# Altium PCB clock_led.PcbDoc (part 3 of 3)
Units mm, origin at the board's own origin, x right, y up, seen from the top; angles counter-clockwise.
Board outline 60 x 80 mm, 4 copper layers (TL, L2, L3, BL), stack 1.564 mm thick; 321 components, 72 nets, 902 pads, 698 vias.
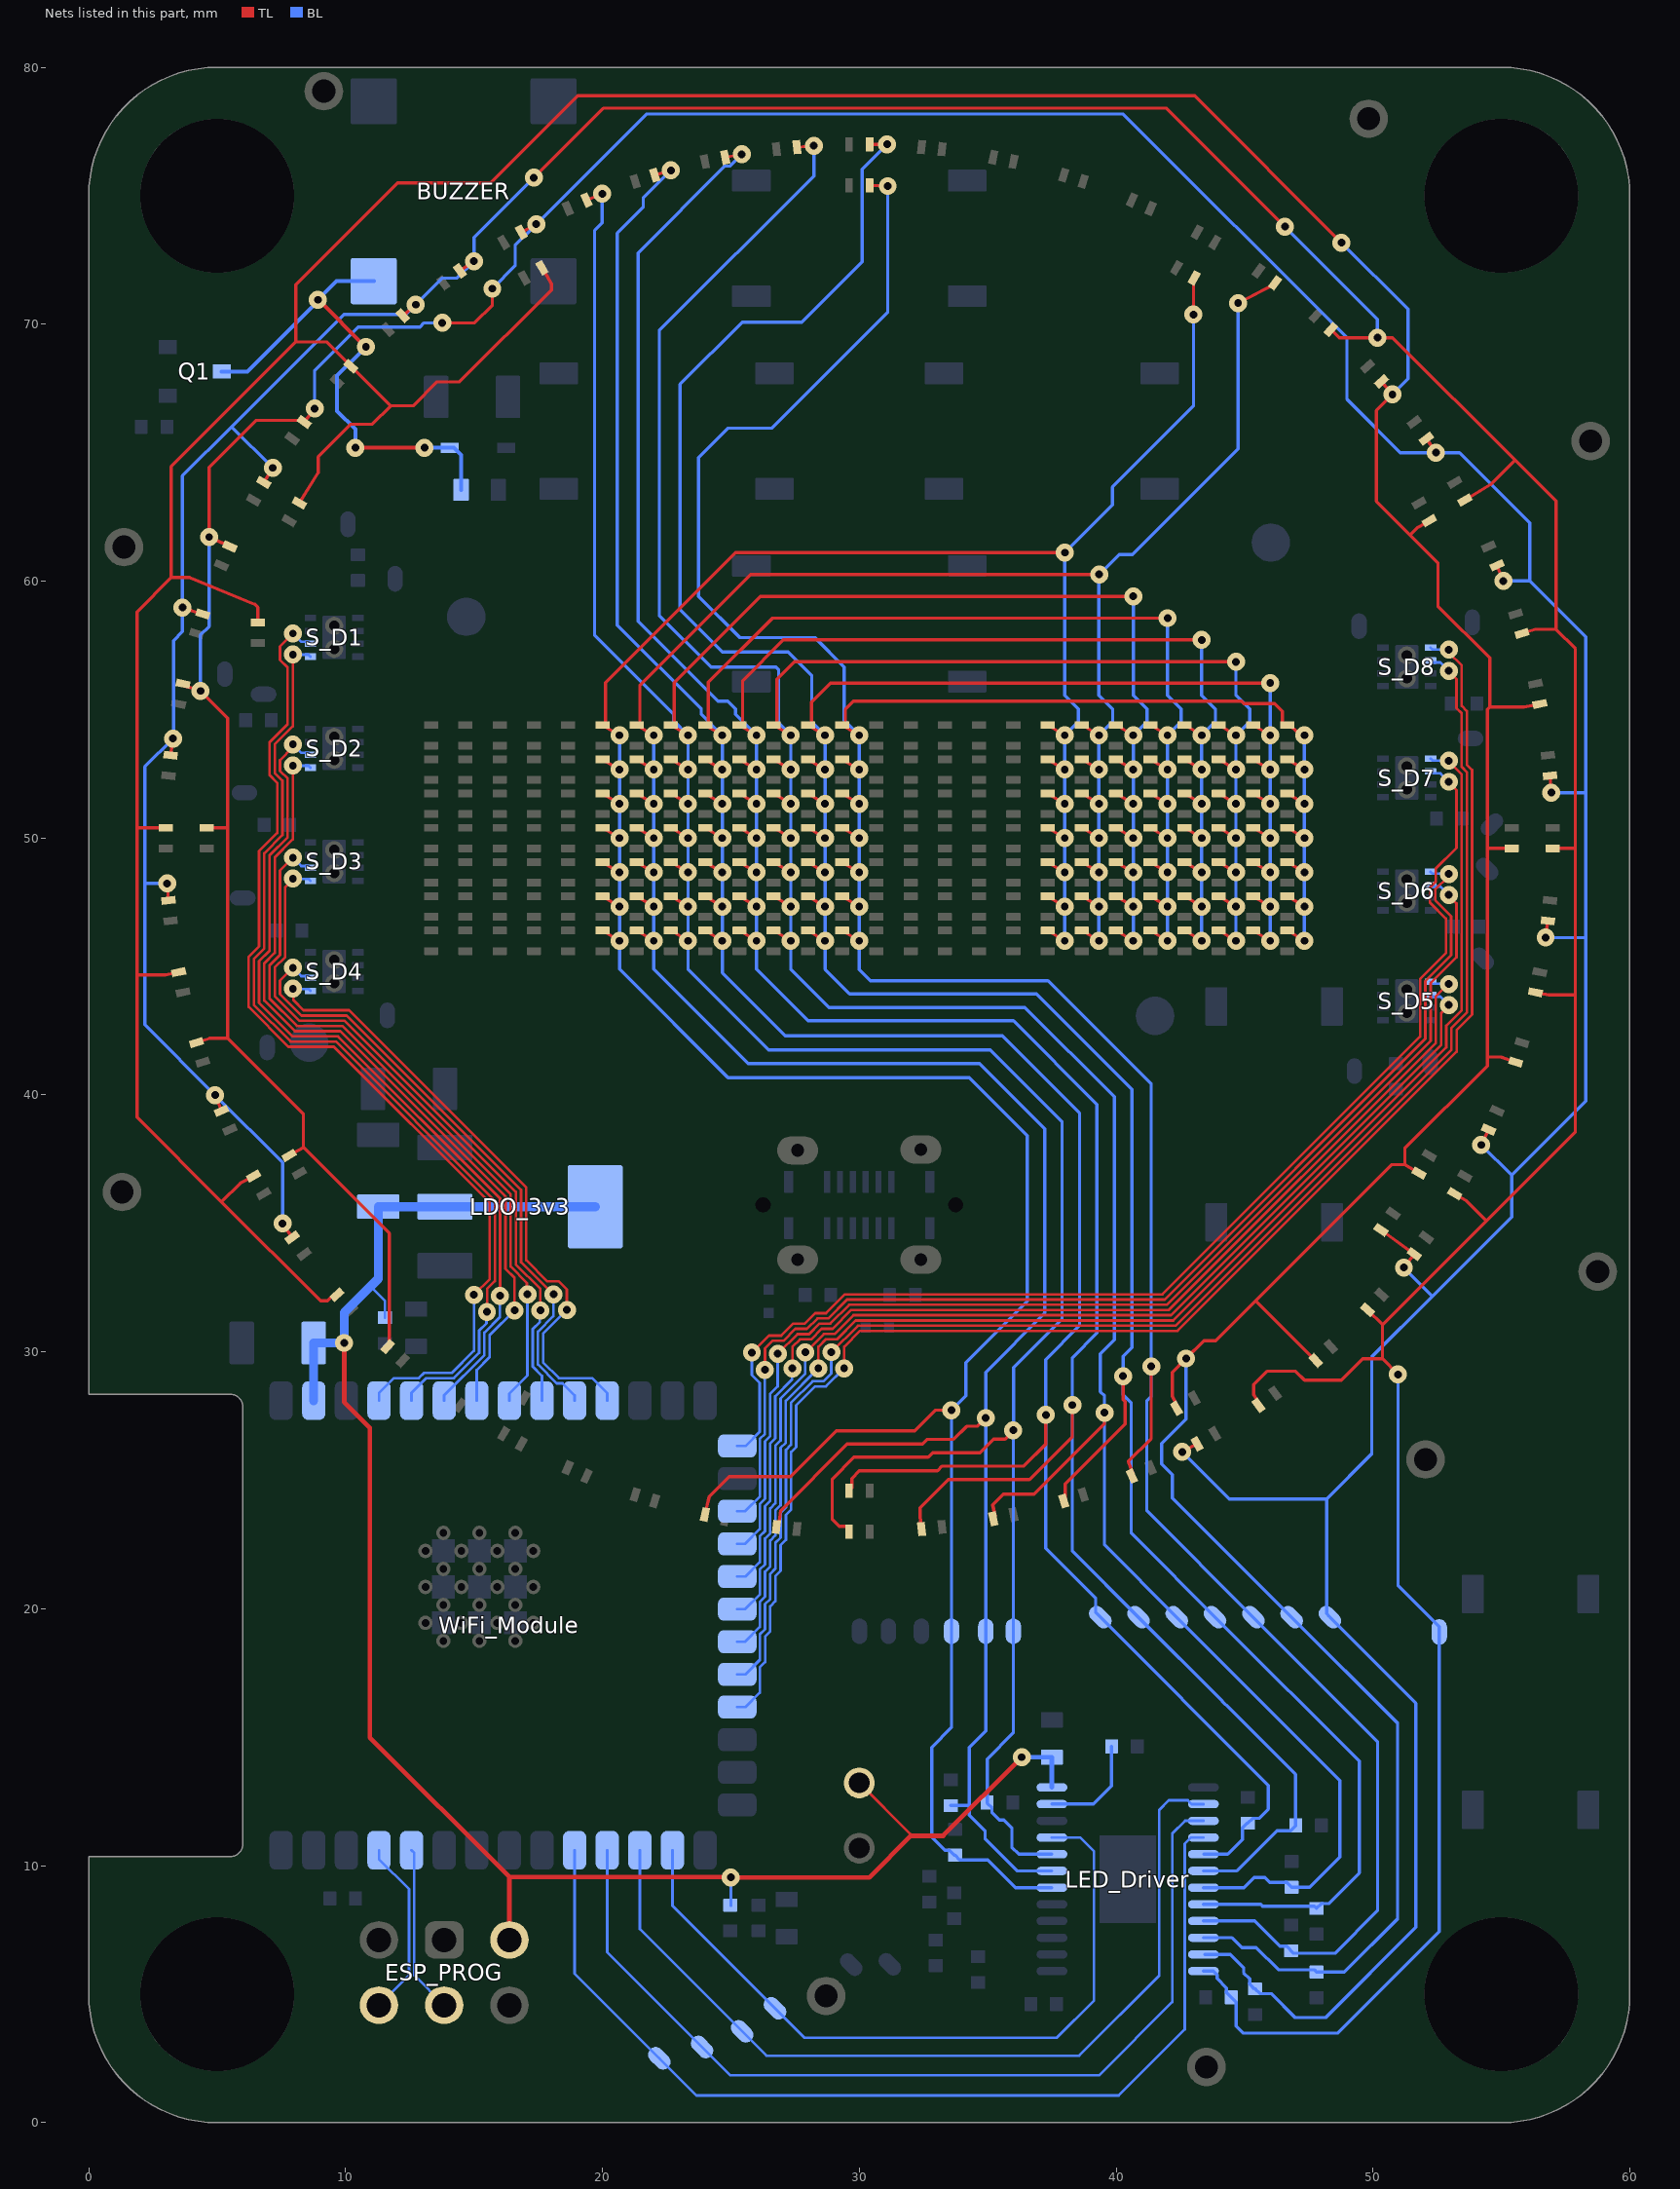
[diagram p5: the nets of this part, all layers, seen from the top]

## Via types
v1: diameter 0.7, hole 0.3, TL to BL, tented both sides, 689 vias
v2: diameter 0.7, hole 0.3, TL to BL, tented top, 6 vias
v3: diameter 1.5, hole 0.9, TL to BL, 3 vias

## Nets (pads, with @x,y where several pads share a name; then routed paths per layer and width w, separated by ;. In a path a pad name is that pad's centre, name@x,y a point inside that pad or via, vN(x,y) a via of type N, cw(c..) or ccw(c..) an arc to the next point about the centre after c; other vN are vias at no path point) (continued)
K5: C10.2 D6.1 D22.1 D38.1 D54.1 D70.1 D86.1 D102.1 D118.1 D134.1 D150.1 D166.1 D182.1 D198.1 D214.1 D230.1 D246.1 LED_Driver.18 pad.2@33.59,19.13 | length 134.4
  TL w0.127: D198.1@20,46.4 v1(20.667,46) ; D166.1@20,47.733 v1(20.667,47.333) ; D134.1@20,49.067 v1(20.667,48.667) ; D102.1@20,50.4 v1(20.667,50) ; D70.1@20,51.733 v1(20.667,51.333) ; D38.1@20,53.067 v1(20.667,52.667) ; D6.1@20,54.4 20.04,54.4 20.126,54.486 20.126,56.049 25.187,61.11 v1@38.013,61.11 ; D6.1@20.074,54.356 v1(20.667,54) ; D230.1@23.995,23.673 24.041,23.867 24.16,24.369 24.941,25.15 27.327,25.15 29.109,26.932 32.16,26.932 32.961,27.733 v1(33.59,27.733) ; D214.1@37.333,46.4 v1(38,46) ; D182.1@37.333,47.733 v1(38,47.333) ; D150.1@37.333,49.067 v1(38,48.667) ; D118.1@37.333,50.4 v1(38,50) ; D86.1@37.333,51.733 v1(38,51.333) ; D54.1@37.333,53.067 v1(38,52.667) ; D22.1@37.333,54.4 v1(38,54) v1@38.003,54.003 ; v1(43.013,70.375) 43.013,71.764 D246.1@43.046,71.797
  BL w0.127: v1(20.667,54) v1(20.667,52.667) v1(20.667,51.333) v1(20.667,50) v1(20.667,48.667) v1(20.667,47.333) v1(20.667,46) 20.667,44.899 24.89,40.676 34.291,40.676 36.543,38.424 36.543,31.971 34.157,29.586 34.157,28.3 v1(33.59,27.733) pad.2@33.59,19.13 33.59,15.38 32.824,14.613 32.824,11.109 33.328,10.604 33.514,10.604 C10.2@33.713,10.405 ; C10.2@33.725,10.417 33.912,10.231 35.008,10.231 36.088,9.15 LED_Driver.18@37.5,9.15 ; v1(38,46) v1(38,54) 38.532,54.532 38.532,55.029 38.006,55.555 v1(38.006,61.108) 39.86,62.963 39.86,63.661 43.013,66.814 v1(43.013,70.375)
K6: C11.2 D7.1 D23.1 D39.1 D55.1 D71.1 D87.1 D103.1 D119.1 D135.1 D151.1 D167.1 D183.1 D199.1 D215.1 D231.1 D247.1 LED_Driver.19 pad.2@34.923,19.13 | length 131.6
  TL w0.127: D199.1@21.334,46.4 v1(22,46) ; D167.1@21.334,47.733 v1(22,47.333) ; D135.1@21.334,49.067 v1(22,48.667) ; D103.1@21.334,50.4 v1(22,50) ; D71.1@21.334,51.733 v1(22,51.333) ; D39.1@21.334,53.067 v1(22,52.667) ; D7.1@21.334,54.4 21.374,54.4 21.46,54.486 21.46,55.95 25.77,60.26 v1(39.339,60.26) ; D7.1@21.407,54.356 v1(22,54) ; D231.1@26.78,23.19 26.871,23.261 26.94,23.824 29.532,26.417 32.466,26.417 32.648,26.598 33.67,26.598 34.18,27.108 34.587,27.108 34.91,27.431 v1(34.923,27.431) ; D215.1@38.666,46.4 v1(39.333,46) ; D183.1@38.666,47.733 v1(39.333,47.333) ; D151.1@38.666,49.067 v1(39.333,48.667) ; D119.1@38.666,50.4 v1(39.333,50) ; D87.1@38.666,51.733 v1(39.333,51.333) ; D55.1@38.666,53.067 v1(39.333,52.667) ; D23.1@38.666,54.4 v1(39.333,54) v1@39.336,54.003 ; v1(44.75,70.825) 44.767,70.825 46.178,71.557 D247.1@46.194,71.608
  BL w0.127: v1(22,54) v1(22,52.667) v1(22,51.333) v1(22,50) v1(22,48.667) v1(22,47.333) v1(22,46) 22,44.899 25.679,41.22 34.682,41.22 37.221,38.682 37.221,31.508 34.923,29.211 v1(34.923,27.431) pad.2@34.923,19.13 34.923,15.249 34.285,14.611 34.285,11.968 34.903,11.35 34.903,11.042 36.145,9.8 LED_Driver.19@37.5,9.8 ; C11.2@33.563,12.345 34.285,12.345 ; v1(39.333,46) v1(39.333,54) 39.865,54.532 39.865,55.029 39.333,55.561 v1@39.333,60.254 ; v1(39.339,60.26) 40.115,61.036 40.632,61.036 44.75,65.154 v1(44.75,70.825)
K7: C12.2 D8.1 D24.1 D40.1 D56.1 D72.1 D88.1 D104.1 D120.1 D136.1 D152.1 D168.1 D184.1 D200.1 D216.1 D232.1 D248.1 LED_Driver.20 pad.2@35.998,19.13 | length 137.1
  TL w0.127: D248.1@19.384,74.828 v1(19.995,75.078) ; D200.1@22.667,46.4 v1(23.334,46) ; D168.1@22.667,47.733 v1(23.334,47.333) ; D136.1@22.667,49.067 v1(23.334,48.667) ; D104.1@22.667,50.4 v1(23.334,50) ; D72.1@22.667,51.733 v1(23.334,51.333) ; D40.1@22.667,53.067 v1(23.334,52.667) ; D8.1@22.667,54.4 D8.1@22.707,54.4 ; D8.1@22.74,54.356 v1(23.334,54) ; D8.1@22.767,54.4 D8.1@22.707,54.4 ; D232.1@29.6,23 29.6,23.099 29.489,23.211 29.22,23.211 28.95,23.481 28.95,25.054 29.796,25.9 32.685,25.9 32.861,26.076 34.705,26.076 35.238,26.609 35.68,26.609 35.998,26.927 v1(35.998,26.95) ; D216.1@40,46.4 v1(40.666,46) ; D184.1@40,47.733 v1(40.666,47.333) ; D152.1@40,49.067 v1(40.666,48.667) ; D120.1@40,50.4 v1(40.666,50) ; D88.1@40,51.733 v1(40.666,51.333) ; D56.1@40,53.067 v1(40.666,52.667) ; D24.1@40,54.4 v1(40.666,54) v1@40.669,54.002 ; v1(40.671,59.41) 26.146,59.41 22.793,56.057 22.793,54.486 D8.1@22.707,54.4
  BL w0.127: v1(19.995,75.078) 19.995,73.95 19.698,73.653 19.698,57.887 22.773,54.811 22.773,54.56 v1(23.334,54) v1(23.334,52.667) v1(23.334,51.333) v1(23.334,50) v1(23.334,48.667) v1(23.334,47.333) v1(23.334,46) 23.334,44.899 26.479,41.753 35.094,41.753 37.898,38.949 37.898,31.282 36.013,29.396 36.013,26.964 v1(35.998,26.95) pad.2@35.998,19.13 35.998,15.176 34.981,14.159 C12.2@34.981,12.459 ; C12.2@34.981,12.434 35.168,12.247 35.168,12.059 35.451,11.776 35.639,11.776 35.941,11.474 35.941,10.722 36.213,10.45 LED_Driver.20@37.5,10.45 ; v1(40.666,46) v1(40.666,54) 41.199,54.532 41.199,55.029 40.666,55.561 40.666,59.405 v1(40.671,59.41)
K8: C13.2 D9.1 D25.1 D41.1 D57.1 D73.1 D89.1 D105.1 D121.1 D137.1 D153.1 D169.1 D185.1 D201.1 D217.1 D233.1 D249.1 LED_Driver.5 pad.2@39.382,19.674 | length 139.6
  TL w0.127: D249.1@22.038,75.802 v1(22.671,75.986) ; D201.1@24,46.4 v1(24.667,46) ; D169.1@24,47.733 v1(24.667,47.333) ; D137.1@24,49.067 v1(24.667,48.667) ; D105.1@24,50.4 v1(24.667,50) ; D73.1@24,51.733 v1(24.667,51.333) ; D41.1@24,53.067 v1(24.667,52.667) ; D9.1@24,54.4 D9.1@24.04,54.4 ; D9.1@24.074,54.356 v1(24.667,54) ; D9.1@24.1,54.4 D9.1@24.04,54.4 ; D233.1@29.6,24.6 29.709,24.709 29.709,25.075 30.003,25.369 33.045,25.369 33.23,25.554 36.411,25.554 37.264,26.407 v1(37.264,27.549) ; D217.1@41.333,46.4 v1(42,46) ; D185.1@41.333,47.733 v1(42,47.333) ; D153.1@41.333,49.067 v1(42,48.667) ; D121.1@41.333,50.4 v1(42,50) ; D89.1@41.333,51.733 v1(42,51.333) ; D57.1@41.333,53.067 v1(42,52.667) ; D25.1@41.333,54.4 v1(42,54) v1@42.001,54.001 ; v1(42.003,58.56) 26.617,58.56 24.126,56.069 24.126,54.486 D9.1@24.04,54.4
  BL w0.127: v1(22.671,75.986) 21.59,74.905 21.59,74.551 20.579,73.54 20.579,58.29 23.849,55.02 23.849,54.81 v1@24.658,54 ; v1(24.667,54) v1(24.667,52.667) v1(24.667,51.333) v1(24.667,50) v1(24.667,48.667) v1(24.667,47.333) v1(24.667,46) 24.667,44.758 27.122,42.303 35.573,42.303 38.576,39.3 38.576,31.014 37.264,29.702 v1(37.264,27.549) 37.264,22.356 39.204,20.416 39.204,19.852 45.929,13.128 45.929,12.206 45.569,11.846 45.315,11.846 C13.2@45.129,11.66 45.104,11.66 44.917,11.473 44.917,11.025 44.342,10.449 LED_Driver.5@43.422,10.449 ; v1(42,46) v1(42,54) 42.532,54.532 42.532,55.029 42,55.561 42,58.557 v1(42.003,58.56)
K9: C14.2 D10.1 D26.1 D42.1 D58.1 D74.1 D90.1 D106.1 D122.1 D138.1 D154.1 D170.1 D186.1 D202.1 D218.1 D234.1 D250.1 LED_Driver.6 pad.2@40.872,19.674 | length 140.6
  TL w0.127: D250.1@24.778,76.493 v1(25.428,76.61) ; D202.1@25.333,46.4 v1(26,46) ; D170.1@25.333,47.733 v1(26,47.333) ; D138.1@25.333,49.067 v1(26,48.667) ; D106.1@25.333,50.4 v1(26,50) ; D74.1@25.333,51.733 v1(26,51.333) ; D42.1@25.333,53.067 v1(26,52.667) ; D10.1@25.333,54.4 D10.1@25.374,54.4 ; D10.1@25.407,54.356 v1(26,54) ; D10.1@25.433,54.4 D10.1@25.374,54.4 ; D234.1@32.424,23.106 32.401,23.316 32.372,23.575 32.372,23.931 33.474,25.032 36.628,25.032 38.296,26.701 v1(38.296,27.932) ; D218.1@42.666,46.4 v1(43.333,46) ; D186.1@42.666,47.733 v1(43.333,47.333) ; D154.1@42.666,49.067 v1(43.333,48.667) ; D122.1@42.666,50.4 v1(43.333,50) ; D90.1@42.666,51.733 v1(43.333,51.333) ; D58.1@42.666,53.067 v1(43.333,52.667) ; D26.1@42.666,54.4 v1(43.333,54) ; v1(43.335,57.71) 27.039,57.71 25.46,56.13 25.46,54.486 D10.1@25.374,54.4
  BL w0.127: v1(25.428,76.61) 24.972,76.155 24.767,76.155 21.39,72.778 21.39,58.437 24.505,55.322 24.88,55.322 25.182,55.02 25.182,54.818 v1(26,54) v1(26,52.667) v1(26,51.333) v1(26,50) v1(26,48.667) v1(26,47.333) v1(26,46) 26,44.899 28.013,42.886 36.002,42.886 39.254,39.633 39.254,30.738 38.296,29.78 v1(38.296,27.932) 38.296,22.251 pad.2@40.872,19.674 44.124,16.423 44.124,16.415 44.425,16.113 44.433,16.113 46.991,13.556 46.991,11.548 46.804,11.361 46.266,11.361 44.704,9.8 LED_Driver.6@43.4,9.8 ; v1(43.333,46) v1(43.333,54) 43.865,54.532 43.865,55.029 43.333,55.561 43.333,57.708 v1(43.335,57.71)
K10: C15.2 D11.1 D27.1 D43.1 D59.1 D75.1 D91.1 D107.1 D123.1 D139.1 D155.1 D171.1 D187.1 D203.1 D219.1 D235.1 D251.1 LED_Driver.7 pad.2@42.363,19.674 | length 142
  TL w0.127: D203.1@26.667,46.4 v1(27.333,46) ; D171.1@26.667,47.733 v1(27.333,47.333) ; D139.1@26.667,49.067 v1(27.333,48.667) ; D107.1@26.667,50.4 v1(27.333,50) ; D75.1@26.667,51.733 v1(27.333,51.333) ; D43.1@26.667,53.067 v1(27.333,52.667) ; D11.1@26.667,54.4 26.707,54.4 26.793,54.486 26.793,56.18 27.473,56.86 v1(44.666,56.86) ; D11.1@26.74,54.356 v1(27.333,54) ; D251.1@27.576,76.894 v1@28.234,76.943 ; D235.1@35.222,23.507 35.288,23.609 35.194,24.045 35.614,24.466 36.799,24.466 39.546,27.213 v1(39.546,27.637) ; D219.1@44,46.4 v1(44.666,46) ; D187.1@44,47.733 v1(44.666,47.333) ; D155.1@44,49.067 v1(44.666,48.667) ; D123.1@44,50.4 v1(44.666,50) ; D91.1@44,51.733 v1(44.666,51.333) ; D59.1@44,53.067 v1(44.666,52.667) ; D27.1@44,54.4 v1(44.666,54)
  BL w0.127: v1(28.234,76.942) 28.234,75.766 22.217,69.748 22.217,58.667 24.229,56.654 26.758,56.654 26.865,56.548 26.865,54.469 v1(27.333,54) v1(27.333,52.667) v1(27.333,51.333) v1(27.333,50) v1(27.333,48.667) v1(27.333,47.333) v1(27.333,46) 27.333,44.899 28.825,43.408 36.453,43.408 39.932,39.928 39.932,30.466 39.39,29.924 39.39,28.453 39.546,28.297 v1(39.546,27.637) 39.546,22.49 pad.2@42.363,19.674 48.713,13.324 48.713,10.338 47.542,9.167 C15.2@46.831,9.167 46.644,9.354 45.982,9.354 45.797,9.539 45.37,9.539 44.981,9.15 LED_Driver.7@43.4,9.15 ; v1(44.666,46) v1(44.666,54) 45.198,54.532 45.198,55.029 44.666,55.561 v1(44.666,56.86)
K11: C16.2 D12.1 D28.1 D44.1 D60.1 D76.1 D92.1 D108.1 D124.1 D140.1 D156.1 D172.1 D188.1 D204.1 D220.1 D236.1 D252.1 LED_Driver.8 pad.2@43.853,19.674 | length 142.2
  TL w0.127: D204.1@28,46.4 v1(28.667,46) ; D172.1@28,47.733 v1(28.667,47.333) ; D140.1@28,49.067 v1(28.667,48.667) ; D108.1@28,50.4 v1(28.667,50) ; D76.1@28,51.733 v1(28.667,51.333) ; D44.1@28,53.067 v1(28.667,52.667) ; D12.1@28,54.4 D12.1@28.074,54.4 ; D12.1@28.074,54.356 v1(28.667,54) ; D12.1@28.1,54.4 D12.1@28.074,54.4 ; D252.1@30.4,77 v1(31.083,77) ; D236.1@37.963,24.198 38.014,24.248 38.014,24.859 40.355,27.2 40.355,28.063 40.27,28.148 v1(40.27,29.058) ; D220.1@45.333,46.4 v1(46,46) ; D188.1@45.333,47.733 v1(46,47.333) ; D156.1@45.333,49.067 v1(46,48.667) ; D124.1@45.333,50.4 v1(46,50) ; D92.1@45.333,51.733 v1(46,51.333) ; D60.1@45.333,53.067 v1(46,52.667) ; D28.1@45.333,54.4 v1(46,54) ; v1(46,56.035) 28.878,56.035 28.139,55.296 28.139,54.465 D12.1@28.074,54.4
  BL w0.127: v1(31.083,77) 30.114,76.031 30.114,72.43 27.762,70.079 25.447,70.079 23.028,67.66 23.028,58.889 24.675,57.243 27.227,57.243 28.152,56.318 28.152,54.515 v1(28.667,54) v1(28.667,52.667) v1(28.667,51.333) v1(28.667,50) v1(28.667,48.667) v1(28.667,47.333) v1(28.667,46) 28.667,44.891 29.628,43.93 36.895,43.93 40.61,40.214 40.61,30.166 40.27,29.826 v1(40.27,29.058) 40.27,28.322 40.588,28.004 40.588,22.939 pad.2@44.025,19.502 ; LED_Driver.8@43.4,8.5 45.633,8.5 45.702,8.431 47.717,8.431 C16.2@47.806,8.342 47.992,8.528 48.269,8.528 49.463,9.722 49.463,14.074 pad.2@44.035,19.502 ; v1(46,46) v1(46,54) v1(46,56.035)
K12: C17.2 D13.1 D29.1 D45.1 D61.1 D77.1 D93.1 D109.1 D125.1 D141.1 D157.1 D173.1 D189.1 D205.1 D221.1 D237.1 D253.1 LED_Driver.9 pad.2@45.343,19.674 | length 138.9
  TL w0.127: D205.1@29.333,46.4 v1(30,46) ; D173.1@29.333,47.733 v1(30,47.333) ; D141.1@29.333,49.067 v1(30,48.667) ; D109.1@29.333,50.4 v1(30,50) ; D77.1@29.333,51.733 v1(30,51.333) ; D45.1@29.333,53.067 v1(30,52.667) ; D13.1@29.333,54.4 29.407,54.4 29.46,54.453 29.46,55.018 29.767,55.325 44.884,55.325 44.98,55.229 46.178,55.229 46.48,54.927 46.48,54.486 46.566,54.4 46.766,54.4 47.057,54.11 47.223,54.11 v1(47.333,54) ; D13.1@29.407,54.356 v1(30,54) ; D253.1@30.4,75.4 v1(31.108,75.376) ; D237.1@40.616,25.172 40.656,25.259 40.472,25.737 41.367,26.632 v1(41.367,29.437) ; D221.1@46.666,46.4 v1(47.333,46) ; D189.1@46.666,47.733 v1(47.333,47.333) ; D157.1@46.666,49.067 v1(47.333,48.667) ; D125.1@46.666,50.4 v1(47.333,50) ; D93.1@46.666,51.733 v1(47.333,51.333) ; D61.1@46.666,53.067 v1(47.333,52.667)
  BL w0.127: v1(31.108,75.376) 31.108,70.458 26.604,65.954 24.894,65.954 23.746,64.807 23.746,59.402 25.346,57.802 28.269,57.802 29.41,56.66 29.41,54.59 v1(30,54) v1(30,52.667) v1(30,51.333) v1(30,50) v1(30,48.667) v1(30,47.333) v1(30,46) 30,44.882 30.431,44.452 37.348,44.452 41.367,40.433 v1(41.367,29.437) 41.367,28.27 41.197,28.099 41.197,23.821 pad.2@45.343,19.674 50.18,14.838 50.18,8.257 48.516,6.593 46.914,6.593 46.639,6.868 46.383,6.868 45.401,7.85 LED_Driver.9@43.4,7.85 ; v1(47.333,46) v1(47.333,47.333) v1(47.333,48.667) v1(47.333,50) v1(47.333,51.333) v1(47.333,52.667) v1(47.333,54)
K13: C18.2 D14.1 D30.1 D46.1 D62.1 D78.1 D94.1 D110.1 D126.1 D142.1 D158.1 D174.1 D190.1 D206.1 D222.1 D238.1 D254.1 LED_Driver.11 pad.2@48.323,19.674 | length 201.2
  TL w0.127: D78.1@3.673,56.005 3.726,55.914 4.337,55.752 v1(4.353,55.726) 5.416,54.662 5.416,50.4 ; D142.1@4.198,42.037 4.399,42.104 4.7,42.204 5.416,42.204 ; D110.1@4.6,50.4 5.416,50.4 ; D46.1@5.493,61.358 v1(4.691,61.715) 4.691,64.428 6.522,66.259 8.327,66.259 D14.1@8.392,66.194 ; D174.1@7.803,37.646 7.987,37.75 8.36,37.961 ; D14.1@8.392,66.194 v1(8.796,66.716) ; D206.1@11.636,30.203 11.703,30.27 11.703,34.618 8.36,37.961 ; v1(13.764,70.05) 15.031,70.05 15.715,70.734 v1(15.715,71.385) ; D254.1@16.847,73.582 v1(17.428,73.895) ; v1(42.572,26.105) D238.1@43.154,26.417 ; D222.1@50.314,34.747 50.485,34.622 51.437,33.931 D190.1@51.608,33.806 ; v1(51.204,33.284) D190.1@51.608,33.806 ; D30.1@52.079,65.547 v1(52.45,65) ; v1(54.216,38.058) D158.1@54.502,38.652 ; D62.1@54.828,60.616 v1(55.078,60.005) ; v1(56.721,46.126) D126.1@56.809,46.779 ; D94.1@56.893,52.424 v1(56.942,51.766) ; 5.416,42.204 8.36,39.26 8.36,37.961 ; 5.416,42.204 5.416,50.4
  BL w0.127: v1(4.353,55.726) 4.353,57.899 4.691,58.237 v1(4.691,61.715) ; v1(8.796,66.716) 8.796,68.202 10.485,69.89 12.899,69.89 13.059,70.05 v1(13.764,70.05) ; v1(15.715,71.385) 16.603,72.273 16.603,73.069 v1(17.428,73.895) 21.713,78.179 40.273,78.179 48.988,69.464 48.988,67.072 51.06,65 v1(52.45,65) 53.368,65 56.107,62.261 56.107,60.005 ; v1(42.572,26.105) 44.402,24.275 48.196,24.275 ; LED_Driver.11@43.463,6.554 43.468,6.55 44.455,6.55 44.964,6.04 44.964,5.837 45.198,5.604 45.198,5.396 45.384,5.209 C18.2@45.407,5.209 ; C18.2@45.432,5.209 C18.2@45.407,5.209 ; pad.2@48.303,19.704 48.196,19.81 48.196,24.275 ; pad.2@48.323,19.674 51.675,16.323 51.675,7.603 48.165,4.093 46.961,4.093 46.032,5.023 45.594,5.023 C18.2@45.407,5.209 ; v1(51.204,33.284) 52.319,32.169 ; v1(54.216,38.058) 55.4,36.874 ; v1(55.078,60.005) 56.107,60.005 ; v1(56.721,46.126) 58.285,46.126 ; v1(56.942,51.766) 58.285,51.766 ; 48.196,24.275 49.953,26.032 49.953,29.803 52.319,32.169 ; 52.319,32.169 55.4,35.25 55.4,36.874 ; 55.4,36.874 58.285,39.758 58.285,46.126 ; 56.107,60.005 58.285,57.828 58.285,51.766 ; 58.285,46.126 58.285,51.766
K14: C19.2 D15.1 D31.1 D47.1 D63.1 D79.1 D95.1 D111.1 D127.1 D143.1 D159.1 D175.1 D191.1 D207.1 D223.1 D239.1 D255.1 LED_Driver.10 pad.2@46.833,19.674 | length 219.1
  TL w0.127: D111.1@3,50.4 1.878,50.4 ; D143.1@3.507,44.778 3.3,44.736 2.987,44.672 1.878,44.672 ; D175.1@6.417,36.846 6.231,36.746 5.895,36.564 5.172,35.842 ; D79.1@6.589,58.39 6.589,58.977 6.469,59.097 3.94,60.138 3.217,60.138 ; D47.1@8.203,63.046 8.938,64.225 8.938,64.838 10.207,66.107 11.037,66.107 11.754,66.823 ; D207.1@9.667,32.231 9.568,32.236 9.291,31.988 9.026,31.988 5.172,35.842 ; D15.1@10.203,68.364 9.255,69.311 8.071,69.311 ; D15.1@10.213,68.364 11.754,66.823 ; D255.1@17.646,72.197 17.754,72.015 18.013,71.576 18.013,71.325 14.443,67.755 13.564,67.755 12.632,66.823 11.754,66.823 ; D239.1@42.354,27.803 42.385,27.898 42.187,28.287 42.187,29.208 v1(42.723,29.743) 43.419,30.439 43.878,30.439 45.438,31.999 ; D223.1@47.769,29.667 45.438,31.999 ; v1(48.773,73.175) 43.057,78.891 19.041,78.891 15.651,75.501 12.033,75.501 8.071,71.54 8.071,69.311 ; D31.1@50.333,67.769 v1(50.759,67.265) 50.131,66.637 50.131,63.108 51.446,61.793 ; D191.1@51.797,36.954 51.616,37.063 51.241,37.288 ; D63.1@52.197,62.354 52.015,62.246 51.732,62.078 51.446,61.793 ; D127.1@55.4,49.6 54.453,49.6 ; D159.1@55.555,41.276 55.009,41.469 54.966,41.476 54.453,41.476 ; D95.1@56.493,55.222 56.286,55.181 55.881,55.1 54.544,55.1 ; 1.878,44.672 1.878,50.4 ; 1.878,44.672 1.878,39.135 5.172,35.842 ; 1.878,50.4 1.878,58.8 3.217,60.138 ; 3.217,60.138 3.217,64.457 8.071,69.311 ; 45.438,31.999 50.726,37.288 51.241,37.288 ; 51.241,37.288 51.241,37.921 54.453,41.133 54.453,41.476 ; 51.446,61.793 52.53,60.709 52.53,59.027 54.544,57.013 54.544,55.1 ; 54.453,41.476 54.453,49.6 ; 54.453,49.6 54.453,55.009 54.544,55.1
  BL w0.127: v1(42.723,29.743) 42.723,27.382 41.77,26.43 41.77,25.641 42.189,25.222 42.189,24.318 pad.2@46.833,19.674 50.958,15.55 50.958,7.934 48.886,5.863 C19.2@47.806,5.863 47.716,5.952 46.317,5.952 45.455,6.814 44.899,6.814 44.514,7.2 LED_Driver.10@43.4,7.2 ; v1(48.773,73.175) 51.366,70.582 51.366,67.872 v1(50.759,67.265)
K15: C20.2 D16.1 D32.1 D48.1 D64.1 D80.1 D96.1 D112.1 D128.1 D144.1 D160.1 D176.1 D192.1 D208.1 D224.1 D240.1 D256.1 LED_Driver.12 pad.2@52.583,19.098 | length 197
  TL w0.127: v1(3.058,48.234) D144.1@3.106,47.576 ; D112.1@3.19,53.22 v1(3.279,53.874) ; v1(3.651,58.969) 4.43,58.716 D80.1@4.445,58.724 ; v1(4.922,39.995) D176.1@5.172,39.384 ; D48.1@6.817,63.846 v1(7.165,64.408) ; v1(7.55,35) D208.1@7.922,34.455 ; D16.1@12.231,70.333 v1(12.735,70.759) ; D256.1@14.455,72.078 v1(15,72.45) ; v1(17.329,75.701) 20.036,78.408 41.967,78.408 v1(46.575,73.8) ; D240.1@45.547,27.921 45.567,28.023 45.362,28.329 45.362,28.738 45.874,29.25 46.984,29.25 47.337,28.898 48.773,28.898 49.604,29.729 50.371,29.729 ; D32.1@48.364,69.796 48.685,69.475 v1(50.175,69.475) 50.767,69.475 55.528,64.714 ; D224.1@49.797,31.636 50.371,31.062 ; v1(50.975,29.125) 50.371,29.729 ; D192.1@53.183,36.154 53.365,36.046 53.64,35.885 54.417,35.108 ; D64.1@53.583,63.154 54.585,63.763 55.523,64.701 ; 55.532,64.71 57.125,63.117 57.125,58.122 ; D96.1@55.802,57.963 56.004,58.026 56.31,58.122 57.125,58.122 ; D160.1@56.327,43.995 56.534,43.953 56.836,43.891 57.879,43.891 ; D128.1@57,49.6 57.879,49.6 ; 50.371,29.729 50.371,31.062 ; 50.371,31.062 54.417,35.108 ; 54.417,35.108 57.879,38.57 57.879,43.891 ; 57.125,58.122 57.879,57.368 57.879,49.6 ; 57.879,43.891 57.879,49.6
  BL w0.127: v1(3.058,48.234) 2.185,48.234 ; v1(7.165,64.408) 5.563,66.01 ; v1(7.55,35) 7.55,37.367 v1(4.922,39.995) 2.185,42.733 2.185,48.234 ; v1(17.329,75.701) 15,73.371 v1(15,72.45) 14.343,71.793 13.77,71.793 12.359,70.382 9.935,70.382 5.563,66.01 ; LED_Driver.12@43.4,5.9 43.784,5.9 43.934,5.75 43.934,5.613 44.301,5.247 44.301,5.064 C20.2@44.487,4.877 44.674,4.691 44.674,3.76 44.948,3.485 48.626,3.485 52.583,7.443 52.583,19.302 50.975,20.91 v1(50.975,29.125) ; v1(46.575,73.8) 50.175,70.2 v1(50.175,69.475) ; 2.185,48.234 2.185,52.779 v1(3.279,53.874) 3.302,53.897 3.302,57.687 3.651,58.036 v1(3.651,58.969) 3.651,64.098 5.563,66.01
LEDCLK: LED_Driver.3 pad.2@23.879,2.946 WiFi_Module.30 | length 37.1
  BL w0.102: WiFi_Module.30@20.191,10.605 20.191,6.634 24.984,1.841 39.336,1.841 42.187,4.692 42.187,11.249 42.687,11.75 LED_Driver.3@43.4,11.75
LEDIREF: LED_Driver.23 R38.1 | length 4.2
  BL w0.127: LED_Driver.23@37.5,12.4 39.125,12.4 39.825,13.1 R38.1@39.825,14.65
LEDLATCH: LED_Driver.4 pad.2@22.217,2.507 WiFi_Module.31 | length 39.6
  BL w0.102: WiFi_Module.31@18.921,10.605 18.921,5.804 pad.2@22.217,2.507 23.664,1.061 40.1,1.061 42.673,3.634 42.673,10.861 42.912,11.1 LED_Driver.4@43.4,11.1
LEDMOSI: LED_Driver.2 pad.2@25.443,3.557 WiFi_Module.29 | length 35
  BL w0.102: WiFi_Module.29@21.461,10.605 21.461,7.539 26.391,2.609 38.559,2.609 41.677,5.727 41.677,12.175 42.049,12.546 42.791,12.546 42.938,12.4 LED_Driver.2@43.4,12.4
LEDPWM: LED_Driver.21 pad.2@26.718,4.457 WiFi_Module.28 | length 29
  BL w0.102: WiFi_Module.28@22.731,10.605 22.731,8.444 27.868,3.307 37.682,3.307 39.14,4.765 39.14,10.559 38.598,11.1 LED_Driver.21@37.5,11.1
NetBUZZER_2: BUZZER.2 C23.2 D257.A Q1.D | length 20.3
  TL w0.152: v1(8.925,70.95) 8.945,70.95 10.775,69.12 v1(10.796,69.12) ; v1(10.381,65.188) v1(13.075,65.188)
  BL w0.152: Q1.D@5.175,68.161 6.187,68.161 8.925,70.899 v1(8.925,70.95) 9.65,71.675 BUZZER.2@11.1,71.675 ; v1(10.381,65.188) 10.381,65.914 9.675,66.62 9.675,67.999 v1(10.796,69.12) ; v1(13.075,65.188) 14.226,65.188 14.5,64.914 C23.2@14.5,63.55
RX: ESP_PROG.6 WiFi_Module.37 | length 7
  BL w0.102: ESP_PROG.6@11.301,4.575 12.47,5.745 12.47,9.093 11.301,10.262 WiFi_Module.37@11.301,10.605
SW0: S_D7.6 WiFi_Module.15 | length 47.4
  TL w0.102: v1(25.82,29.973) 26.484,30.638 26.962,30.638 27.425,31.101 27.878,31.101 28.286,31.509 28.71,31.509 29.441,32.241 41.805,32.241 51.838,42.274 51.838,44.52 52.843,45.525 52.843,46.869 52.219,47.493 52.219,48.078 52.446,48.304 52.446,48.811 53.249,49.614 53.249,51.863 52.95,52.162 v1(52.95,52.19)
  BL w0.102: WiFi_Module.15@25.251,26.34 25.571,26.34 26.122,26.89 26.122,28.799 25.82,29.101 v1(25.82,29.973) ; S_D7.6@52.243,52.591 52.317,52.517 52.623,52.517 v1(52.95,52.19)
SW1: S_D6.5 WiFi_Module.17 | length 45.7
  TL w0.102: v1@26.329,29.31 26.329,30.14 26.623,30.434 27.047,30.434 27.51,30.897 27.962,30.897 28.371,31.306 28.794,31.306 29.526,32.038 41.889,32.038 52.041,42.19 52.041,44.436 53.046,45.441 53.046,46.953 52.422,47.577 52.422,47.993 52.925,48.496 v1@52.925,48.604
  BL w0.102: WiFi_Module.17@25.251,23.8 25.56,23.8 26.128,24.368 26.128,26.609 26.325,26.806 v1(26.325,29.306) ; S_D6.5@52.243,48.686 52.317,48.612 52.942,48.612 v1(52.95,48.604)
SW2: S_D6.6 WiFi_Module.18 | length 45.8
  TL w0.102: v1(26.831,29.932) 27.594,30.694 28.046,30.694 28.455,31.103 28.878,31.103 29.61,31.834 41.973,31.834 52.244,42.106 52.244,44.352 53.249,45.357 53.249,47.458 52.95,47.757 v1(52.95,47.785)
  BL w0.102: WiFi_Module.18@25.251,22.53 25.55,22.53 26.128,23.108 26.128,24.081 26.331,24.284 26.331,26.521 26.528,26.718 26.528,28.357 26.827,28.656 v1@26.827,29.928 ; S_D6.6@52.243,48.186 52.317,48.112 52.623,48.112 v1(52.95,47.785)
SW3: S_D5.5 WiFi_Module.19 | length 43.2
  TL w0.102: v1(27.398,29.362) 27.398,30.196 ; 27.399,30.197 27.693,30.491 28.13,30.491 28.539,30.899 28.962,30.899 29.694,31.631 42.057,31.631 52.448,42.022 52.448,43.845 v1@52.925,44.322
  BL w0.102: WiFi_Module.19@25.251,21.26 25.573,21.26 26.128,21.815 26.128,22.82 26.331,23.023 26.331,23.996 26.534,24.2 26.534,26.437 26.731,26.634 26.731,28.272 27.378,28.919 27.378,29.342 v1(27.398,29.362) ; S_D5.5@52.243,44.403 52.317,44.329 52.942,44.329 v1(52.95,44.322)
SW4: S_D5.6 WiFi_Module.20 | length 43.5
  TL w0.102: v1(27.901,29.989) 27.915,29.989 28.623,30.696 29.046,30.696 29.778,31.428 42.141,31.428 52.651,41.937 52.651,43.175 52.95,43.475 v1(52.95,43.503)
  BL w0.102: WiFi_Module.20@25.251,19.99 25.562,19.99 26.128,20.555 26.128,21.528 26.331,21.731 26.331,22.736 26.534,22.939 26.534,23.912 26.737,24.115 26.737,26.353 26.934,26.55 26.934,28.188 27.9,29.154 v1(27.901,29.989) ; S_D5.6@52.243,43.903 52.317,43.829 52.623,43.829 v1(52.95,43.503)
SW5: S_D7.5 WiFi_Module.21 | length 54.6
  TL w0.102: v1(28.407,29.363) 28.413,29.37 28.413,30.199 28.707,30.493 29.13,30.493 29.862,31.225 42.226,31.225 52.854,41.853 52.854,42.696 53.452,43.294 53.452,52.481 v1@52.925,53.009
  BL w0.102: WiFi_Module.21@25.251,18.72 25.557,18.72 26.128,19.29 26.128,20.268 26.331,20.471 26.331,21.444 26.534,21.647 26.534,22.652 26.737,22.855 26.737,23.828 26.941,24.031 26.941,26.269 27.138,26.466 27.138,28.094 v1(28.407,29.363) ; S_D7.5@52.243,53.091 52.317,53.017 52.942,53.017 v1(52.95,53.009)
SW6: S_D8.6 WiFi_Module.22 | length 59.7
  TL w0.102: v1(28.915,29.991) 29.946,31.022 42.31,31.022 53.057,41.769 53.057,42.612 53.656,43.21 53.656,52.565 53.452,52.769 53.452,54.854 53.249,55.057 53.249,56.183 52.95,56.482 v1(52.95,56.51)
  BL w0.102: WiFi_Module.22@25.251,17.45 25.564,17.45 26.132,18.018 26.132,19.005 26.331,19.204 26.331,20.182 26.534,20.385 26.534,21.359 26.737,21.563 26.737,22.568 26.941,22.771 26.941,23.744 27.144,23.947 27.144,26.185 27.341,26.382 27.341,28.01 28.192,28.861 28.615,28.861 28.909,29.155 v1@28.909,29.984 ; S_D8.6@52.243,56.911 52.317,56.837 52.623,56.837 v1(52.95,56.51)
SW7: S_D8.5 WiFi_Module.23 | length 61.8
  TL w0.102: v1(29.411,29.361) 29.418,29.367 29.418,30.206 30.03,30.818 42.394,30.818 53.26,41.685 53.26,42.528 53.859,43.126 53.859,52.65 53.656,52.853 53.656,54.938 53.452,55.141 53.452,56.719 52.95,57.221 v1(52.95,57.329)
  BL w0.102: WiFi_Module.23@25.251,16.18 25.574,16.18 26.128,16.733 26.128,17.726 26.335,17.933 26.335,18.921 26.534,19.12 26.534,20.098 26.737,20.301 26.737,21.275 26.941,21.478 26.941,22.484 27.144,22.687 27.144,23.66 27.347,23.863 27.347,26.101 27.544,26.298 27.544,27.926 28.276,28.658 28.708,28.658 v1(29.411,29.361) ; S_D8.5@52.243,57.411 52.317,57.337 52.942,57.337 v1(52.95,57.329)
SW8: S_D1.6 WiFi_Module.4 | length 39.8
  TL w0.102: v1(7.95,57.963) 7.448,57.46 7.448,56.936 7.747,56.636 7.747,54.437 7.041,53.731 7.041,52.447 7.341,52.148 7.341,50.201 6.635,49.495 6.635,45.787 6.229,45.381 6.229,43.423 7.778,41.874 9.544,41.874 15.614,35.804 15.614,32.839 v1(15.001,32.226)
  BL w0.102: v1(7.95,57.963) 8.277,57.636 8.558,57.636 S_D1.6@8.632,57.562 ; WiFi_Module.4@11.301,28.105 11.301,28.404 11.879,28.982 12.859,28.982 13.062,29.185 14.139,29.185 15.001,30.048 v1@15.001,32.15
SW9: S_D1.5 WiFi_Module.5 | length 37.5
  TL w0.102: v1(7.95,57.144) 7.95,54.353 7.245,53.647 7.245,52.531 7.544,52.232 7.544,50.117 6.838,49.411 6.838,45.703 6.432,45.296 6.432,43.507 7.862,42.077 9.628,42.077 15.817,35.888 15.817,32.754 15.511,32.448 15.511,31.563 v1(15.507,31.559)
  BL w0.102: v1(7.95,57.144) 7.958,57.136 8.558,57.136 S_D1.5@8.632,57.062 ; WiFi_Module.5@12.571,28.105 12.571,28.406 13.146,28.982 14.223,28.982 15.205,29.964 15.205,30.834 15.487,31.116 15.487,31.539 v1(15.507,31.559)
SW10: S_D2.6 WiFi_Module.6 | length 33
  TL w0.102: v1(7.95,53.642) 7.95,53.534 7.448,53.031 7.448,52.615 7.747,52.316 7.747,50.032 7.041,49.327 7.041,45.619 6.635,45.212 6.635,43.591 7.946,42.28 9.712,42.28 16.02,35.972 v1@16.02,32.192
  BL w0.102: v1(7.95,53.642) 8.277,53.316 8.558,53.316 S_D2.6@8.632,53.242 ; WiFi_Module.6@13.841,28.105 13.841,28.312 15.408,29.879 15.408,30.75 16.009,31.351 v1@16.009,32.181
  other v1: 16.013,32.185
SW11: S_D2.5 WiFi_Module.7 | length 31.6
  TL w0.102: v1(7.95,52.823) 7.95,49.948 7.245,49.243 7.245,45.535 6.838,45.128 6.838,43.675 8.03,42.483 9.796,42.483 16.223,36.056 16.223,33.237 16.58,32.88 v1(16.58,31.615)
  BL w0.102: v1(7.95,52.823) 7.958,52.816 8.558,52.816 S_D2.5@8.632,52.742 ; WiFi_Module.7@15.111,28.105 15.111,29.295 15.611,29.795 15.611,30.646 v1(16.58,31.615)
SW12: S_D3.6 WiFi_Module.8 | length 27.8
  TL w0.102: v1(7.95,49.238) 7.448,48.735 7.448,45.45 7.041,45.044 7.041,43.759 8.115,42.686 9.88,42.686 16.427,36.14 16.427,33.321 17.063,32.685 17.063,32.261 v1(17.083,32.242)
  BL w0.102: v1(7.95,49.238) 8.277,48.911 8.558,48.911 S_D3.6@8.632,48.837 ; WiFi_Module.8@16.381,28.105 16.381,28.381 17.083,29.083 v1@17.083,32.165
SW13: S_D3.5 WiFi_Module.9 | length 26.9
  TL w0.102: v1(7.95,48.419) 7.95,48.391 7.651,48.092 7.651,45.366 7.245,44.96 7.245,43.844 8.199,42.89 9.965,42.89 16.63,36.224 16.63,33.405 17.585,32.45 17.585,31.619 v1(17.588,31.616)
  BL w0.102: v1(7.95,48.419) 7.958,48.411 8.558,48.411 S_D3.5@8.632,48.337 ; v1(17.588,31.616) 17.569,31.596 17.569,31.173 17.286,30.891 17.286,29.43 17.651,29.065 WiFi_Module.9@17.651,28.105
SW14: S_D4.6 WiFi_Module.10 | length 24.3
  TL w0.102: v1(7.95,44.955) 7.448,44.452 7.448,43.928 8.283,43.093 10.049,43.093 16.833,36.309 16.833,33.489 18.079,32.244 v1(18.097,32.244)
  BL w0.102: v1(7.95,44.955) 8.277,44.628 8.558,44.628 S_D4.6@8.632,44.554 ; v1@18.091,32.237 18.091,31.393 17.489,30.792 17.489,29.514 18.225,28.779 18.453,28.779 18.921,28.311 WiFi_Module.10@18.921,28.105
SW15: S_D4.5 WiFi_Module.11 | length 24.6
  TL w0.102: v1(7.95,44.136) 7.97,44.116 7.97,43.693 8.367,43.296 10.133,43.296 17.036,36.393 17.036,33.573 17.864,32.746 18.305,32.746 18.616,32.435 v1(18.616,31.632)
  BL w0.102: v1(7.95,44.136) 7.958,44.128 8.558,44.128 S_D4.5@8.632,44.054 ; v1(18.616,31.632) 17.692,30.708 17.692,29.598 18.309,28.982 19.602,28.982 20.191,28.393 WiFi_Module.11@20.191,28.105
TX: ESP_PROG.5 WiFi_Module.36 | length 6.6
  BL w0.102: WiFi_Module.36@12.571,10.605 12.674,10.502 12.674,5.742 ESP_PROG.5@13.841,4.575
VCC: C1.2 C3.1 C25.1 ESP_PROG.3 LDO_3v3.2 LED_Driver.24 R1.1 R2.1 U1.C WiFi_Module.2 | length 73.3
  TL w0.102: U1.C@30,13.228 31.999,11.229 31.999,11.18 32.012,11.167
  TL w0.178: v1(9.949,30.35) 9.949,28.051 10.95,27.05 10.95,14.991 16.381,9.56 ; ESP_PROG.3@16.381,7.115 16.381,9.56 ; v1@24.989,9.56 16.381,9.56 ; v1(25.001,9.548) 30.393,9.548 32.012,11.167 33.267,11.167 v1(36.325,14.225)
  BL w0.102: 10.972,32.554 10.974,32.553 11.532,31.994 R1.1@11.532,31.331 ; R2.1@25.001,8.444 v1(25.001,9.548)
  BL w0.178: v1(36.325,14.225) C1.2@37.5,14.225 LED_Driver.24@37.5,13.05
  BL w0.35: WiFi_Module.2@8.761,28.105 C3.1@8.761,30.35 v1(9.949,30.35) 9.949,31.531 10.972,32.554 ; 10.974,32.553 11.276,32.855 C25.1@11.276,35.651 LDO_3v3.2@13.871,35.651 LDO_3v3.2@19.721,35.651
pads on no net: BUZZER.3 BUZZER.4 LED_Driver.22 USB.A8 USB.B8 USB.H WiFi_Module.16 WiFi_Module.32 WiFi_Module.33 WiFi_Module.34 WiFi_Module.35

## Polygon pours and split planes (outlines as drawn)
GND on L3 "GND_L3" (solid, remove dead copper, pour order 1): 0,80 0,0 60,0 60,80
GND on TL "GND_TL" (solid, remove dead copper, pour order 7): 0,80 0,0 60,0 60,80
GND on L2 "GND_L2" (solid, remove dead copper, pour order 8): 0,80 0,0 60,0 60,80
GND on BL "GND_BL" (solid, remove dead copper, pour order 9): 0,80 0,0 60,0 60,80

## Keep-outs
Keep-Out Layer:
  lines w0.102: 0,5 ccw(c5,5) 5,0 55,0 ccw(c55,5) 60,5 60,75 ccw(c55,75) 55,80 5,80 ccw(c5,75) 0,75 0,5

## Silkscreen, mask and mechanical layers (free items; w line width, h text height)
Bottom Overlay:
  lines w0.102: 0.076,5.868 cw(c5,5) 5.868,0.076 ; 0.076,74.132 ccw(c5,75) 5.868,79.924 ; 54.132,0.076 cw(c55,5) 59.924,5.868 ; 54.132,79.924 ccw(c55,75) 59.924,74.132
  text "EN" at 13.713,7.614 h2.03
  text "TX" at 16.171,7.623 h2.03
  text "RX" at 18.656,7.623 h2.03
  text "VCC" at 13.331,5.828 h2.03
  text "IO0" at 19.787,5.81 h2.03
  text "GND" at 16.557,5.782 h2.03
Board:
  the board outline again, w0.102
Route Tool Path:
  lines w1: -0.5,10.855 -0.5,27.855 5.501,27.855 5.501,10.936 5.42,10.855 -0.5,10.855

## Text inside footprints (layer, text, board x,y; h text height)
WiFi_Module: Bottom Assembly "ANTENNA" at 3.251,23.855 h1.27 r90